# EAGLE board DIGITAL2_4_JLPCB (EAGLE 6.5.0)
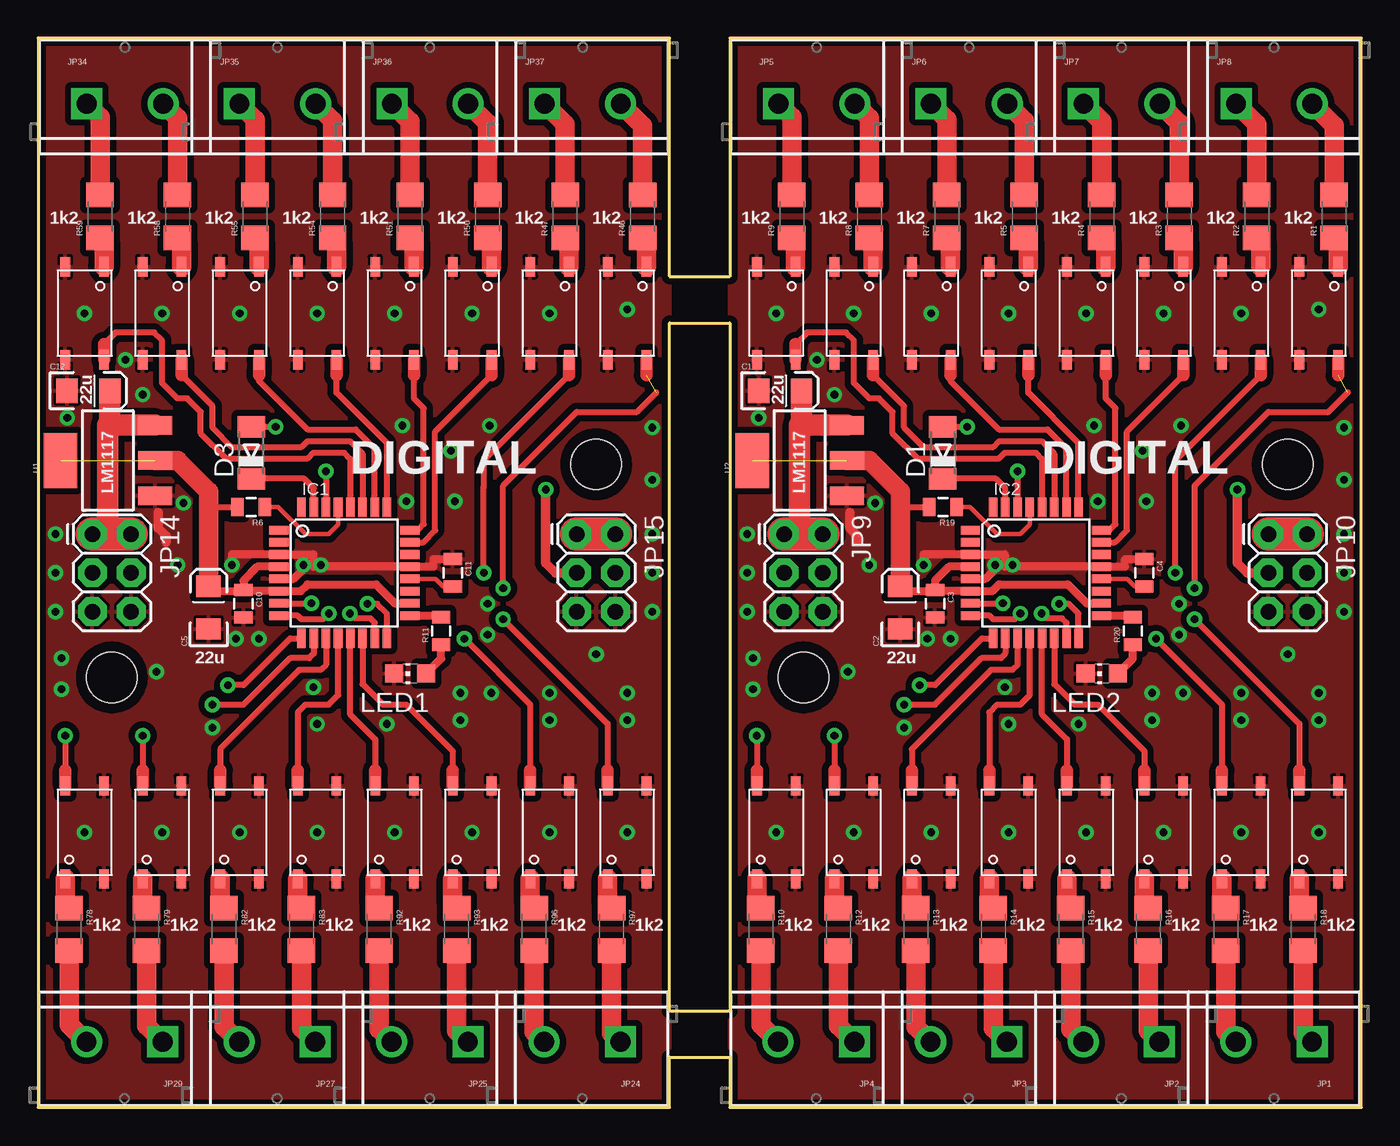
[diagram p0: board, top side]
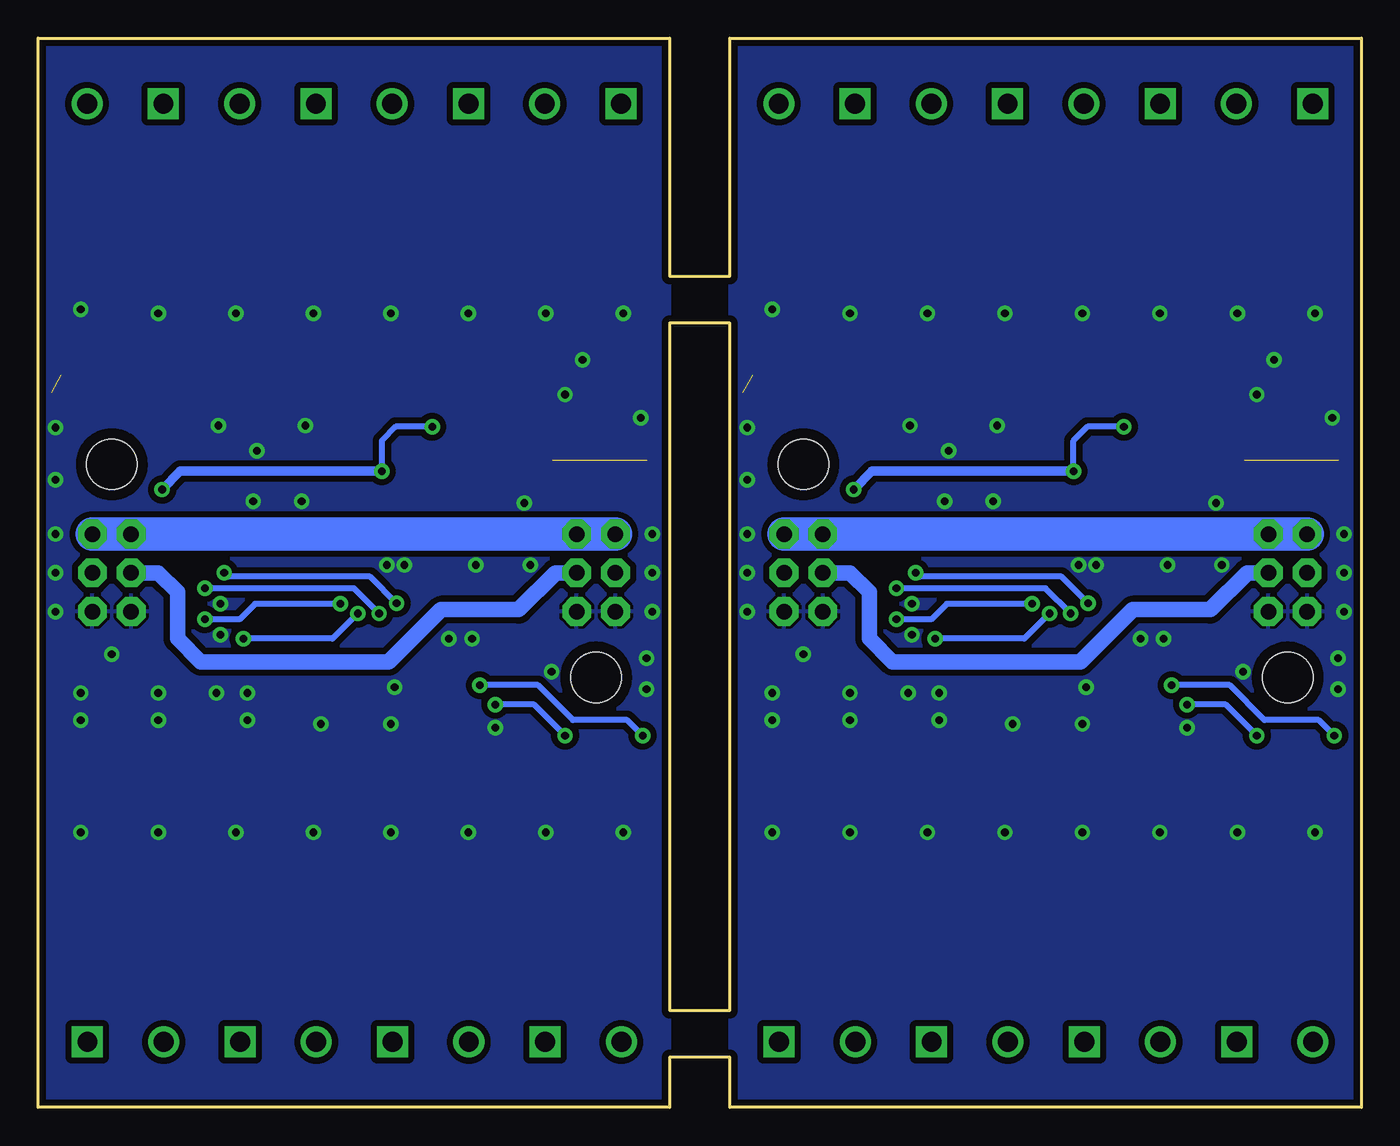
[diagram p1: board, bottom side, seen from below]

Size 86.74 x 70.1 mm. Coordinates in mm from the lower left corner, seen from the top.
Outline: 0,70.1 0,0 41.4,0 41.4,3.3 45.34,3.3 45.34,0 86.74,0 86.74,70.1 45.34,70.1 45.34,54.48 41.4,54.48 41.4,70.1 0,70.1
Outline: 41.4,6.35 41.4,51.44 45.34,51.44 45.34,6.35 41.4,6.35
Copper layers (1*16): Top 0.035mm / dielectric 1.5mm / Bottom 0.035mm
Design rules "default *": minimum track width 8mil, minimum drill 0.4mm, track to track 8mil, track to pad 8mil, pad to pad 8mil, via to via 8mil, smd to smd 8mil, copper to edge 10mil, drill to drill 8mil, minimum pad ring 8mil, minimum via ring 10mil, stop-mask expansion 3mil, vias tented up to drill 0mil, thermal gap 8mil

## Footprints (pad centres in the part's own frame; a part is rotated, then mirrored left to right if it is on the bottom)
EIA3216 = smd 1.4 x 1.6: A 1.4,0; C -1.4,0
0805 = smd 0.8 x 1.2: 1 -0.9,0; 2 0.9,0
MINIMELF = smd 1.4 x 1.8: A 1.7,0; C -1.7,0
TQFP32-08 = smd 1.27 x 0.559: 1 -4.293,2.8; 2 -4.293,2; 3 -4.293,1.2; 4 -4.293,0.4; 5 -4.293,-0.4; 6 -4.293,-1.2; 7 -4.293,-2; 8 -4.293,-2.8; 17 4.293,-2.8; 18 4.293,-2; 19 4.293,-1.2; 20 4.293,-0.4; 21 4.293,0.4; 22 4.293,1.2; 23 4.293,2; 24 4.293,2.8 | smd 0.559 x 1.27: 9 -2.8,-4.293; 10 -2,-4.293; 11 -1.2,-4.293; 12 -0.4,-4.293; 13 0.4,-4.293; 14 1.2,-4.293; 15 2,-4.293; 16 2.8,-4.293; 25 2.8,4.293; 26 2,4.293; 27 1.2,4.293; 28 0.4,4.293; 29 -0.4,4.293; 30 -1.2,4.293; 31 -2,4.293; 32 -2.8,4.293
SCREWTERMINAL-5MM-2 = drill 1.3 pad 2.032 square: 1 0,0 | drill 1.3 pad 2.032: 2 5,0
2X3 = drill 1.016 pad 1.88 octagon: 1 0,0; 2 0,2.54; 3 2.54,0; 4 2.54,2.54; 5 5.08,0; 6 5.08,2.54
CHIP-LED0805 = smd 1.2 x 1.2: A 0,-1.05; C 0,1.05
1206 = smd 1.6 x 1.8: 1 -1.4,0; 2 1.4,0
STAND-OFF = hole 3.302: 0,0
SOT223 = smd 1.219 x 2.235: 1 -2.311,-3.099; 2 0,-3.099; 3 2.311,-3.099 | smd 3.6 x 2.2: 4 0,3.099
TLP181-I = smd 1.27 x 0.635: P$1 -3.048,1.27; P$2 -3.048,-1.27; P$3 3.048,-1.27; P$4 3.048,1.27

## Placement (x,y rotation side)
C1  22uF/16V  [EIA3216]  48.64,46.99 0 top
C2  22uF/16V  [EIA3216]  56.52,32.77 90 top
C3  100n  [0805]  58.8,33.02 270 top
C4  100n  [0805]  72.52,35.05 270 top
C5  22uF/16V  [EIA3216]  11.18,32.77 90 top
C10  100n  [0805]  13.46,33.02 270 top
C11  100n  [0805]  27.18,35.05 270 top
C12  22uF/16V  [EIA3216]  3.3,46.99 0 top
D1  1N4148  [MINIMELF]  59.31,42.93 90 top
D3  1N4148  [MINIMELF]  13.97,42.93 90 top
IC1  MEGA8-AI  [TQFP32-08]  20.07,35.05 0 top
IC2  MEGA8-AI  [TQFP32-08]  65.41,35.05 0 top
JP1  [SCREWTERMINAL-5MM-2]  83.51,4.3 180 top
JP2  [SCREWTERMINAL-5MM-2]  73.51,4.3 180 top
JP3  [SCREWTERMINAL-5MM-2]  63.51,4.3 180 top
JP4  [SCREWTERMINAL-5MM-2]  53.51,4.3 180 top
JP5  [SCREWTERMINAL-5MM-2]  48.53,65.81 0 top
JP6  [SCREWTERMINAL-5MM-2]  58.53,65.81 0 top
JP7  [SCREWTERMINAL-5MM-2]  68.53,65.81 0 top
JP8  [SCREWTERMINAL-5MM-2]  78.53,65.81 0 top
JP9  [2X3]  48.9,37.59 270 top
JP10  [2X3]  80.64,37.59 270 top
JP14  [2X3]  3.56,37.59 270 top
JP15  [2X3]  35.31,37.59 270 top
JP24  [SCREWTERMINAL-5MM-2]  38.17,4.3 180 top
JP25  [SCREWTERMINAL-5MM-2]  28.17,4.3 180 top
JP27  [SCREWTERMINAL-5MM-2]  18.17,4.3 180 top
JP29  [SCREWTERMINAL-5MM-2]  8.17,4.3 180 top
JP34  [SCREWTERMINAL-5MM-2]  3.19,65.81 0 top
JP35  [SCREWTERMINAL-5MM-2]  13.19,65.81 0 top
JP36  [SCREWTERMINAL-5MM-2]  23.19,65.81 0 top
JP37  [SCREWTERMINAL-5MM-2]  33.19,65.81 0 top
LED1  [CHIP-LED0805]  24.38,28.45 90 top
LED2  [CHIP-LED0805]  69.72,28.45 90 top
R1  1.2K  [1206]  84.96,58.42 90 top
R2  1.2K  [1206]  79.88,58.42 90 top
R3  1.2K  [1206]  74.8,58.42 90 top
R4  1.2K  [1206]  69.72,58.42 90 top
R5  1.2K  [1206]  64.64,58.42 90 top
R6  10K  [0805]  13.97,39.37 180 top
R7  1.2K  [1206]  59.56,58.42 90 top
R8  1.2K  [1206]  54.48,58.42 90 top
R9  1.2K  [1206]  49.4,58.42 90 top
R10  1.2K  [1206]  47.37,11.68 270 top
R11  [0805]  26.42,31.24 90 top
R12  1.2K  [1206]  52.45,11.68 270 top
R13  1.2K  [1206]  57.53,11.68 270 top
R14  1.2K  [1206]  62.61,11.68 270 top
R15  1.2K  [1206]  67.69,11.68 270 top
R16  1.2K  [1206]  72.77,11.68 270 top
R17  1.2K  [1206]  77.85,11.68 270 top
R18  1.2K  [1206]  82.93,11.68 270 top
R19  10K  [0805]  59.31,39.37 180 top
R20  [0805]  71.75,31.24 90 top
R46  1.2K  [1206]  39.62,58.42 90 top
R47  1.2K  [1206]  34.54,58.42 90 top
R50  1.2K  [1206]  29.46,58.42 90 top
R51  1.2K  [1206]  24.38,58.42 90 top
R54  1.2K  [1206]  19.3,58.42 90 top
R55  1.2K  [1206]  14.22,58.42 90 top
R58  1.2K  [1206]  9.14,58.42 90 top
R59  1.2K  [1206]  4.06,58.42 90 top
R78  1.2K  [1206]  2.03,11.68 270 top
R79  1.2K  [1206]  7.11,11.68 270 top
R82  1.2K  [1206]  12.19,11.68 270 top
R83  1.2K  [1206]  17.27,11.68 270 top
R92  1.2K  [1206]  22.35,11.68 270 top
R93  1.2K  [1206]  27.43,11.68 270 top
R96  1.2K  [1206]  32.51,11.68 270 top
R97  1.2K  [1206]  37.59,11.68 270 top
STANDOFF1  STAND-OFF  [STAND-OFF]  4.83,28.19 180 top
STANDOFF2  STAND-OFF  [STAND-OFF]  50.16,28.19 180 top
STANDOFF3  STAND-OFF  [STAND-OFF]  36.58,42.16 180 top
STANDOFF4  STAND-OFF  [STAND-OFF]  81.92,42.16 180 top
U1  [SOT223]  4.57,42.42 90 top
U2  [SOT223]  49.91,42.42 90 top
U$1  IS181D-I  [TLP181-I]  83.95,52.07 270 top
U$2  IS181D-I  [TLP181-I]  78.87,52.07 270 top
U$3  IS181D-I  [TLP181-I]  73.79,52.07 270 top
U$4  IS181D-I  [TLP181-I]  68.71,52.07 270 top
U$5  IS181D-I  [TLP181-I]  63.63,52.07 270 top
U$6  IS181D-I  [TLP181-I]  58.55,52.07 270 top
U$7  IS181D-I  [TLP181-I]  53.47,52.07 270 top
U$8  IS181D-I  [TLP181-I]  48.39,52.07 270 top
U$9  IS181D-I  [TLP181-I]  48.39,18.03 90 top
U$10  IS181D-I  [TLP181-I]  53.47,18.03 90 top
U$11  IS181D-I  [TLP181-I]  58.55,18.03 90 top
U$12  IS181D-I  [TLP181-I]  63.63,18.03 90 top
U$13  IS181D-I  [TLP181-I]  38.61,52.07 270 top
U$14  IS181D-I  [TLP181-I]  33.53,52.07 270 top
U$15  IS181D-I  [TLP181-I]  28.45,52.07 270 top
U$16  IS181D-I  [TLP181-I]  23.37,52.07 270 top
U$17  IS181D-I  [TLP181-I]  18.29,52.07 270 top
U$18  IS181D-I  [TLP181-I]  13.21,52.07 270 top
U$19  IS181D-I  [TLP181-I]  8.13,52.07 270 top
U$20  IS181D-I  [TLP181-I]  3.05,52.07 270 top
U$21  IS181D-I  [TLP181-I]  68.71,18.03 90 top
U$22  IS181D-I  [TLP181-I]  73.79,18.03 90 top
U$23  IS181D-I  [TLP181-I]  78.87,18.03 90 top
U$24  IS181D-I  [TLP181-I]  83.95,18.03 90 top
U$29  IS181D-I  [TLP181-I]  3.05,18.03 90 top
U$30  IS181D-I  [TLP181-I]  8.13,18.03 90 top
U$31  IS181D-I  [TLP181-I]  13.21,18.03 90 top
U$32  IS181D-I  [TLP181-I]  18.29,18.03 90 top
U$33  IS181D-I  [TLP181-I]  23.37,18.03 90 top
U$34  IS181D-I  [TLP181-I]  28.45,18.03 90 top
U$35  IS181D-I  [TLP181-I]  33.53,18.03 90 top
U$36  IS181D-I  [TLP181-I]  38.61,18.03 90 top

## Library data of the parts
C1-C5 C10-C12 R1-R20 R46 R47 R50 R51 R54 R55 R58 R59 R78 R79 R82 R83 R92 R93 R96 R97 = SparkFun-Passives
D1 D3 = diode
IC1 IC2 = atmel; MPN: ATMEGA8-16AU; OC_FARNELL: 9171371; OC_NEWARK: 73M8863
JP1-JP8 JP24 JP25 JP27 JP29 JP34-JP37 = SparkFun-Connectors
JP9 JP10 JP14 JP15 = SparkFun-Connectors; PROD_ID: CONN-09701
LED1 LED2 = led
STANDOFF1-STANDOFF4 = SparkFun-Electromechanical
U1 U2 = SparkFun-PowerIC; PROD_ID: VREG-08170
U$1-U$24 U$29-U$36 = IS181-I

## Nets
5V: C12.A JP14.1 JP14.2 JP15.1 JP15.2 U1.3
5V1: C1.A JP9.1 JP9.2 JP10.1 JP10.2 U2.3
COM1: D3.A IC1.30 JP14.4 JP15.3
COM3: D1.A IC2.30 JP9.4 JP10.3
D1: IC2.9 U$9.P$4
D2: IC2.10 U$10.P$4
D3: IC1.8 U$13.P$4
D4: IC1.7 U$14.P$4
D5: IC1.23 U$15.P$4
D6: IC1.24 U$16.P$4
D7: IC1.25 U$17.P$4
D8: IC1.26 U$18.P$4
D9: IC1.27 U$19.P$4
D10: IC1.28 U$20.P$4
D11: IC1.9 U$29.P$4
D12: IC1.10 U$30.P$4
D13: IC1.11 U$31.P$4
D14: IC1.12 U$32.P$4
D15: IC1.13 U$33.P$4
D16: IC1.14 U$34.P$4
D17: IC1.15 U$35.P$4
D18: IC1.16 U$36.P$4
D19: IC2.11 U$11.P$4
D20: IC2.12 U$12.P$4
D21: IC2.13 U$21.P$4
D22: IC2.14 U$22.P$4
D23: IC2.15 U$23.P$4
D24: IC2.16 U$24.P$4
D25: IC2.8 U$1.P$4
D26: IC2.7 U$2.P$4
D27: IC2.23 U$3.P$4
D28: IC2.24 U$4.P$4
D29: IC2.25 U$5.P$4
D30: IC2.26 U$6.P$4
D31: IC2.27 U$7.P$4
D32: IC2.28 U$8.P$4
GND: C5.C C10.2 C11.1 C12.C IC1.3 IC1.5 IC1.21 JP14.5 JP14.6 JP15.5 JP15.6 LED1.C U1.1 U$13.P$2 U$13.P$3 U$14.P$2 U$14.P$3 U$15.P$2 U$15.P$3 U$16.P$2 U$16.P$3 U$17.P$2 U$17.P$3 U$18.P$2 U$18.P$3 U$19.P$2 U$19.P$3 U$20.P$2 U$20.P$3 U$29.P$2 U$29.P$3 U$30.P$2 U$30.P$3 U$31.P$2 U$31.P$3 U$32.P$2 U$32.P$3 U$33.P$2 U$33.P$3 U$34.P$2 U$34.P$3 U$35.P$2 U$35.P$3 U$36.P$2 U$36.P$3
GND2: C1.C C2.C C3.2 C4.1 IC2.3 IC2.5 IC2.21 JP9.5 JP9.6 JP10.5 JP10.6 LED2.C U2.1 U$1.P$2 U$1.P$3 U$2.P$2 U$2.P$3 U$3.P$2 U$3.P$3 U$4.P$2 U$4.P$3 U$5.P$2 U$5.P$3 U$6.P$2 U$6.P$3 U$7.P$2 U$7.P$3 U$8.P$2 U$8.P$3 U$9.P$2 U$9.P$3 U$10.P$2 U$10.P$3 U$11.P$2 U$11.P$3 U$12.P$2 U$12.P$3 U$21.P$2 U$21.P$3 U$22.P$2 U$22.P$3 U$23.P$2 U$23.P$3 U$24.P$2 U$24.P$3
N$1: LED1.A R11.1
N$2: JP8.2 R1.2
N$3: D3.C IC1.31
N$4: JP29.2 R78.2
N$5: C11.2 IC1.20
N$6: JP27.2 R82.2
N$7: JP25.2 R92.2
N$8: JP8.1 R2.2
N$9: R1.1 U$1.P$1
N$10: R2.1 U$2.P$1
N$11: JP24.2 R96.2
N$12: JP7.2 R3.2
N$13: JP7.1 R4.2
N$14: R3.1 U$3.P$1
N$15: R4.1 U$4.P$1
N$16: JP6.2 R5.2
N$17: JP6.1 R7.2
N$18: R5.1 U$5.P$1
N$19: R7.1 U$6.P$1
N$20: JP27.1 R83.2
N$21: JP5.2 R8.2
N$22: JP5.1 R9.2
N$23: JP25.1 R93.2
N$24: R8.1 U$7.P$1
N$25: R9.1 U$8.P$1
N$26: JP4.1 R12.2
N$27: R10.1 U$9.P$1
N$28: JP24.1 R97.2
N$29: R12.1 U$10.P$1
N$30: R13.1 U$11.P$1
N$31: R14.1 U$12.P$1
N$32: R15.1 U$21.P$1
N$33: R16.1 U$22.P$1
N$34: R17.1 U$23.P$1
N$35: R18.1 U$24.P$1
N$36: JP3.1 R14.2
N$37: JP2.1 R16.2
N$38: JP1.1 R18.2
N$39: JP4.2 R10.2
N$40: JP3.2 R13.2
N$41: JP2.2 R15.2
N$42: JP1.2 R17.2
N$45: C4.2 IC2.20
N$46: LED2.A R20.1
N$47: D1.C IC2.31
N$81: JP37.2 R46.2
N$82: JP37.1 R47.2
N$83: R46.1 U$13.P$1
N$84: R47.1 U$14.P$1
N$87: JP36.2 R50.2
N$88: JP36.1 R51.2
N$89: R50.1 U$15.P$1
N$90: R51.1 U$16.P$1
N$93: JP35.2 R54.2
N$94: JP35.1 R55.2
N$95: R54.1 U$17.P$1
N$96: R55.1 U$18.P$1
N$100: JP34.2 R58.2
N$101: JP34.1 R59.2
N$102: R58.1 U$19.P$1
N$103: R59.1 U$20.P$1
N$138: JP29.1 R79.2
N$139: R78.1 U$29.P$1
N$140: R79.1 U$30.P$1
N$146: R82.1 U$31.P$1
N$147: R83.1 U$32.P$1
N$154: R92.1 U$33.P$1
N$155: R93.1 U$34.P$1
N$160: R96.1 U$35.P$1
N$161: R97.1 U$36.P$1
RESET: IC1.29 R6.1
RESET2: IC2.29 R19.1
SCK: IC1.17 R11.2
SCK2: IC2.17 R20.2
VCC: C5.A C10.1 IC1.4 IC1.6 IC1.18 R6.2 U1.2 U1.4
VCC2: C2.A C3.1 IC2.4 IC2.6 IC2.18 R19.2 U2.2 U2.4

## Tracks (layer width: path | path; a pad name or v marks a point on that pad's centre or on a via)
5V
  Top 1.422: 4.57,37.59 4.57,44.73 4.7,44.73 | U1.3 4.7,44.73 | 4.7,44.73 C12.A
  Top 2.184: JP14.2 4.57,37.59 JP14.1 | JP15.1 JP15.2
  Bottom 2.184: JP14.2 JP14.1 JP15.1 JP15.2
5V1
  Top 1.422: 49.91,37.59 49.91,44.73 50.04,44.73 | U2.3 50.04,44.73 | 50.04,44.73 C1.A
  Top 2.184: JP9.2 49.91,37.59 JP9.1 | JP10.1 JP10.2
  Bottom 2.184: JP9.2 JP9.1 JP10.1 JP10.2
COM1  (via drill 0.5)
  Top 0.406: v18.87,41.71 IC1.30 | D3.A v15.57,44.63
  Top 0.61: v33.27,40.51 33.27,35.69 33.91,35.05 JP15.3
  Bottom 0.406: v15.57,44.63 17.96,44.63 18.87,43.72 v18.87,41.71
  Bottom 0.61: v33.27,40.51 32.07,41.71 v18.87,41.71
  Bottom 1.016: JP15.3 33.53,35.05 32.26,33.78 32.26,30.73 30.73,29.21 18.41,29.21 14.99,32.64 9.91,32.64 7.49,35.05 JP14.4
COM3  (via drill 0.5)
  Top 0.406: v64.2,41.71 IC2.30 | D1.A v60.91,44.63
  Top 0.61: v78.61,40.51 78.61,35.69 79.25,35.05 JP10.3
  Bottom 0.406: v60.91,44.63 63.3,44.63 64.2,43.72 v64.2,41.71
  Bottom 0.61: v78.61,40.51 77.41,41.71 v64.2,41.71
  Bottom 1.016: JP10.3 78.87,35.05 77.6,33.78 77.6,30.73 76.07,29.21 63.75,29.21 60.33,32.64 55.24,32.64 52.83,35.05 JP9.4
D1  (via drill 0.5)
  Top 0.406: IC2.9 61.87,30.76 58.8,27.69 v57.78,27.69 | v47.12,24.38 47.12,22.1
  Top 0.813: U$9.P$4 47.12,22.1
  Bottom 0.406: v47.12,24.38 48.13,25.4 51.69,25.4 53.98,27.69 v57.78,27.69
D2  (via drill 0.5)
  Top 0.406: IC2.10 63.41,29.75 63.12,29.46 61.85,29.46 58.8,26.42 v56.77,26.42 | v52.2,24.38 52.2,22.1
  Top 0.813: U$10.P$4 52.2,22.1
  Bottom 0.406: v52.2,24.38 54.23,26.42 v56.77,26.42
D3  (via drill 0.5)  (1 unrouted)
  Top 0.406: IC1.8 17.02,32.25 17.27,32 18.67,32 v19.05,32.38 | v30.48,34.04 30.48,40.77 35.31,45.59 39.24,45.59 40.52,46.87
  Top 0.813: U$13.P$4 39.88,48.01
  Bottom 0.406: v30.48,34.04 20.7,34.04 v19.05,32.38
D4  (via drill 0.5)
  Top 0.406: IC1.7 v17.91,33.05 | v29.21,35.05 29.21,40.64 29.21,40.76 29.21,42.42 34.8,48.01
  Top 0.813: U$14.P$4 34.8,48.01
  Bottom 0.406: v29.21,35.05 28.96,34.8 19.65,34.8 v17.91,33.05
D5
  Top 0.406: IC1.23 25.24,37.05 26.04,37.85 26.04,44.32 29.72,48.01
  Top 0.813: U$15.P$4 29.72,48.01
D6
  Top 0.406: IC1.24 24.9,37.85 25.28,38.24 25.28,45.84 24.64,46.48 24.64,48.01
  Top 0.813: U$16.P$4 24.64,48.01
D7
  Top 0.406: IC1.25 22.87,43.55 19.56,46.86 19.56,48.01
  Top 0.813: U$17.P$4 19.56,48.01
D8
  Top 0.406: IC1.26 22.07,43.21 20.83,44.45 17.65,44.45 14.48,47.62 14.48,48.26
  Top 0.813: U$18.P$4 14.48,48.26 14.48,48.01
D9
  Top 0.406: IC1.27 21.27,42.87 20.45,43.69 17.65,43.69 17.27,43.31 12.7,43.31 11.43,44.58 11.43,45.97 9.4,48.01
  Top 0.813: U$19.P$4 9.4,48.01
D10
  Top 0.406: IC1.28 20.47,42.53 20.07,42.93 18.03,42.93 17.65,42.55 12.32,42.55 10.67,44.2 10.67,45.59 9.78,46.48 9.14,46.48 8.13,47.5 8.13,50.29 7.62,50.8 5.08,50.8 4.32,50.04
  Top 0.813: U$20.P$4 4.32,50.04
D11  (via drill 0.5)
  Top 0.406: IC1.9 16.54,30.76 13.46,27.69 v12.45,27.69 | v1.78,24.38 1.78,22.1
  Top 0.813: U$29.P$4 1.78,22.1
  Bottom 0.406: v1.78,24.38 2.79,25.4 6.35,25.4 8.64,27.69 v12.45,27.69
D12  (via drill 0.5)
  Top 0.406: IC1.10 18.07,29.75 17.78,29.46 16.51,29.46 13.46,26.42 v11.43,26.42 | v6.86,24.38 6.86,22.1
  Top 0.813: U$30.P$4 6.86,22.1
  Bottom 0.406: v6.86,24.38 8.89,26.42 v11.43,26.42
D13
  Top 0.406: IC1.11 18.87,29.03 18.54,28.7 17.13,28.7 11.94,23.51 11.94,22.1
  Top 0.813: U$31.P$4 11.94,22.1
D14
  Top 0.406: IC1.12 19.67,27.03 19.05,26.42 17.53,26.42 17.02,25.91 17.02,22.1
  Top 0.813: U$32.P$4 17.02,22.1
D15
  Top 0.406: IC1.13 20.47,25.76 22.1,24.13 22.1,21.84
  Top 0.813: U$33.P$4 22.1,21.84 22.1,22.1
D16
  Top 0.406: IC1.14 21.27,27.76 22.61,26.42 24.13,26.42 27.18,23.37 27.18,22.1
  Top 0.813: U$34.P$4 27.18,22.1
D17  (via drill 0.5)
  Top 0.406: IC1.15 22.07,31.78 21.78,32.07 20.77,32.07 v20.45,32.38 | v27.94,30.73 32.26,26.42 32.26,22.1
  Top 0.813: U$35.P$4 32.26,22.1
  Bottom 0.406: v27.94,30.73 22.1,30.73 v20.45,32.38
D18  (via drill 0.5)
  Top 0.406: IC1.16 22.87,32.38 22.23,33.02 v21.59,33.02 | v30.48,32 37.34,25.15 37.34,21.84
  Top 0.813: U$36.P$4 37.34,21.84 37.34,22.1
  Bottom 0.406: v21.59,33.02 27.18,33.02 28.19,32 v30.48,32
D19
  Top 0.406: IC2.11 64.2,29.03 63.88,28.7 62.47,28.7 57.28,23.51 57.28,22.1
  Top 0.813: U$11.P$4 57.28,22.1
D20
  Top 0.406: IC2.12 65,27.03 64.39,26.42 62.87,26.42 62.36,25.91 62.36,22.1
  Top 0.813: U$12.P$4 62.36,22.1
D21
  Top 0.406: IC2.13 65.81,25.76 67.44,24.13 67.44,21.84
  Top 0.813: U$21.P$4 67.44,21.84 67.44,22.1
D22
  Top 0.406: IC2.14 66.61,27.76 67.94,26.42 69.47,26.42 72.52,23.37 72.52,22.1
  Top 0.813: U$22.P$4 72.52,22.1
D23  (via drill 0.5)
  Top 0.406: IC2.15 67.41,31.78 67.12,32.07 66.1,32.07 v65.79,32.38 | v73.28,30.73 77.6,26.42 77.6,22.1
  Top 0.813: U$23.P$4 77.6,22.1
  Bottom 0.406: v73.28,30.73 67.44,30.73 v65.79,32.38
D24  (via drill 0.5)
  Top 0.406: IC2.16 68.2,32.38 67.56,33.02 v66.93,33.02 | v75.82,32 82.68,25.15 82.68,21.84
  Top 0.813: U$24.P$4 82.68,21.84 82.68,22.1
  Bottom 0.406: v66.93,33.02 72.52,33.02 73.53,32 v75.82,32
D25  (via drill 0.5)  (1 unrouted)
  Top 0.406: IC2.8 62.36,32.25 62.61,32 64.01,32 v64.39,32.38 | v75.82,34.04 75.82,40.77 80.64,45.59 84.58,45.59 85.86,46.87
  Top 0.813: U$1.P$4 85.22,48.01
  Bottom 0.406: v75.82,34.04 66.04,34.04 v64.39,32.38
D26  (via drill 0.5)
  Top 0.406: IC2.7 v63.25,33.05 | v74.55,35.05 74.55,42.42 80.14,48.01
  Top 0.813: U$2.P$4 80.14,48.01
  Bottom 0.406: v74.55,35.05 74.3,34.8 64.99,34.8 v63.25,33.05
D27
  Top 0.406: IC2.23 70.58,37.05 71.37,37.85 71.37,44.32 75.06,48.01
  Top 0.813: U$3.P$4 75.06,48.01
D28
  Top 0.406: IC2.24 70.24,37.85 70.62,38.24 70.62,45.84 69.98,46.48 69.98,48.01
  Top 0.813: U$4.P$4 69.98,48.01
D29
  Top 0.406: IC2.25 68.2,43.55 64.9,46.86 64.9,48.01
  Top 0.813: U$5.P$4 64.9,48.01
D30
  Top 0.406: IC2.26 67.41,43.21 66.17,44.45 62.99,44.45 59.82,47.62 59.82,48.26
  Top 0.813: U$6.P$4 59.82,48.26 59.82,48.01
D31
  Top 0.406: IC2.27 66.61,42.87 65.79,43.69 62.99,43.69 62.61,43.31 58.04,43.31 56.77,44.58 56.77,45.97 54.74,48.01
  Top 0.813: U$7.P$4 54.74,48.01
D32
  Top 0.406: IC2.28 65.81,42.53 65.41,42.93 63.37,42.93 62.99,42.55 57.66,42.55 56.01,44.2 56.01,45.59 55.12,46.48 54.48,46.48 53.47,47.5 53.47,50.29 52.96,50.8 50.42,50.8 49.66,50.04
  Top 0.813: U$8.P$4 49.66,50.04
GND  (via drill 0.5)
  Top 0.508: v12.7,35.56 12.7,36.25 IC1.3 18.03,36.25 18.03,35.45 IC1.21 25.91,35.45 25.91,35.95 C11.1 | IC1.5 16.75,34.65 17.4,35.31 v17.4,35.56
  Top 0.61: 8.38,37.08 8.38,37.47 7.87,37.97 7.87,38.99
  other vias: 3.05,18.03 23.37,52.07 3.05,52.07 38.61,52.32 8.13,52.07 33.53,52.07 13.21,52.07 28.45,52.07 18.29,52.07 8.13,18.03 13.21,18.03 18.29,18.03 38.61,18.03 33.53,18.03 28.45,18.03 23.37,18.03 9.53,39.62 5.71,49.02 6.86,46.74 18.54,35.56 36.58,29.72 23.88,44.7 29.59,44.7 40.26,44.58 1.91,45.21 1.14,37.59 1.14,35.05 1.14,32.51 40.26,37.59 40.26,35.05 40.26,32.51 1.52,29.46 11.43,24.89 18.29,25.15 22.86,25.15 27.69,25.4 33.53,25.4 38.61,25.4 40.26,41.15 29.46,33.02 7.75,28.57 1.52,27.43 18.03,27.56 27.69,27.18 33.53,27.18 38.61,27.18 29.46,30.99 27.3,39.75 24.13,39.75 12.95,30.73 14.48,30.73 27.05,43.05 9.14,35.56 29.72,27.18
  pour Top (isolate 0.406): 0,70.1 41.4,70.1 41.4,0 0,0
  pour Bottom (isolate 0.406): 0,70.1 41.4,70.1 41.4,0 0,0
GND2  (via drill 0.5)
  Top 0.508: v58.04,35.56 58.04,36.25 IC2.3 63.37,36.25 63.37,35.45 IC2.21 71.25,35.45 71.25,35.95 C4.1 | IC2.5 62.08,34.65 62.74,35.31 v62.74,35.56
  Top 0.61: 53.72,37.08 53.72,37.47 53.21,37.97 53.21,38.99
  other vias: 48.39,18.03 68.71,52.07 48.39,52.07 83.95,52.32 53.47,52.07 78.87,52.07 58.55,52.07 73.79,52.07 63.63,52.07 53.47,18.03 58.55,18.03 63.63,18.03 83.95,18.03 78.87,18.03 73.79,18.03 68.71,18.03 54.86,39.62 51.05,49.02 52.2,46.74 63.88,35.56 81.92,29.72 69.22,44.7 74.93,44.7 85.6,44.58 47.24,45.21 46.48,37.59 46.48,35.05 46.48,32.51 85.6,37.59 85.6,35.05 85.6,32.51 46.86,29.46 56.77,24.89 63.63,25.15 68.2,25.15 73.03,25.4 78.87,25.4 83.95,25.4 85.6,41.15 74.8,33.02 53.09,28.57 46.86,27.43 63.37,27.56 73.03,27.18 78.87,27.18 83.95,27.18 74.8,30.99 72.64,39.75 69.47,39.75 58.29,30.73 59.82,30.73 72.39,43.05 54.48,35.56 75.06,27.18
  pour Top (isolate 0.406): 45.34,70.1 86.74,70.1 86.74,0 45.34,0
  pour Bottom (isolate 0.406): 45.34,70.1 86.74,70.1 86.74,0 45.34,0
N$1
  Top 0.508: LED1.A 26.42,29.43 R11.1
N$2
  Top 1.27: JP8.2 84.96,64.37 R1.2
N$3
  Top 0.406: IC1.31 18.07,40.61 17.45,41.23 D3.C
N$4
  Top 1.27: JP29.2 2.03,5.43 R78.2
N$5
  Top 0.305: IC1.20 26.05,34.65 26.55,34.15 C11.2
N$6
  Top 1.27: JP27.2 12.19,5.27 R82.2
N$7
  Top 1.27: JP25.2 22.35,5.11 R92.2
N$8
  Top 1.27: JP8.1 79.88,64.45 R2.2
N$9
  Top 1.27: R1.1 85.22,56.77 U$1.P$1
N$10
  Top 1.27: R2.1 80.14,56.77 U$2.P$1
N$11
  Top 1.27: JP24.2 32.51,4.95 R96.2
N$12
  Top 1.27: JP7.2 74.8,64.53 R3.2
N$13
  Top 1.27: JP7.1 69.72,64.61 R4.2
N$14
  Top 1.27: R3.1 75.06,56.77 U$3.P$1
N$15
  Top 1.27: R4.1 69.98,56.77 U$4.P$1
N$16
  Top 1.27: JP6.2 64.64,64.69 R5.2
N$17
  Top 1.27: JP6.1 59.56,64.77 R7.2
N$18
  Top 1.27: R5.1 64.9,56.77 U$5.P$1
N$19
  Top 1.27: R7.1 59.82,56.77 U$6.P$1
N$20
  Top 1.27: JP27.1 17.27,5.19 R83.2
N$21
  Top 1.27: JP5.2 54.48,64.85 R8.2
N$22
  Top 1.27: JP5.1 49.4,64.93 R9.2
N$23
  Top 1.27: JP25.1 27.43,5.03 R93.2
N$24
  Top 1.27: R8.1 54.74,56.77 U$7.P$1
N$25
  Top 1.27: R9.1 49.66,56.77 U$8.P$1
N$26
  Top 1.27: JP4.1 52.45,5.35 R12.2
N$27
  Top 1.27: R10.1 47.12,13.34 U$9.P$1
N$28
  Top 1.27: JP24.1 37.59,4.87 R97.2
N$29
  Top 1.27: R12.1 52.2,13.34 U$10.P$1
N$30
  Top 1.27: R13.1 57.28,13.34 U$11.P$1
N$31
  Top 1.27: R14.1 62.36,13.34 U$12.P$1
N$32
  Top 1.27: R15.1 67.44,13.34 U$21.P$1
N$33
  Top 1.27: R16.1 72.52,13.34 U$22.P$1
N$34
  Top 1.27: R17.1 77.6,13.34 U$23.P$1
N$35
  Top 1.27: R18.1 82.68,13.34 U$24.P$1
N$36
  Top 1.27: JP3.1 62.61,5.19 R14.2
N$37
  Top 1.27: JP2.1 72.77,5.03 R16.2
N$38
  Top 1.27: JP1.1 82.93,4.87 R18.2
N$39
  Top 1.27: JP4.2 47.37,5.43 R10.2
N$40
  Top 1.27: JP3.2 57.53,5.27 R13.2
N$41
  Top 1.27: JP2.2 67.69,5.11 R15.2
N$42
  Top 1.27: JP1.2 77.85,4.95 R17.2
N$45
  Top 0.305: IC2.20 71.39,34.65 71.89,34.15 C4.2
N$46
  Top 0.508: LED2.A 71.75,29.43 R20.1
N$47
  Top 0.406: IC2.31 63.41,40.61 62.79,41.23 D1.C
N$81
  Top 1.27: JP37.2 39.62,64.37 R46.2
N$82
  Top 1.27: JP37.1 34.54,64.45 R47.2
N$83
  Top 1.27: R46.1 39.88,56.77 U$13.P$1
N$84
  Top 1.27: R47.1 34.8,56.77 U$14.P$1
N$87
  Top 1.27: JP36.2 29.46,64.53 R50.2
N$88
  Top 1.27: JP36.1 24.38,64.61 R51.2
N$89
  Top 1.27: R50.1 29.72,56.77 U$15.P$1
N$90
  Top 1.27: R51.1 24.64,56.77 U$16.P$1
N$93
  Top 1.27: JP35.2 19.3,64.69 R54.2
N$94
  Top 1.27: JP35.1 14.22,64.77 R55.2
N$95
  Top 1.27: R54.1 19.56,56.77 U$17.P$1
N$96
  Top 1.27: R55.1 14.48,56.77 U$18.P$1
N$100
  Top 1.27: JP34.2 9.14,64.85 R58.2
N$101
  Top 1.27: JP34.1 4.06,64.93 R59.2
N$102
  Top 1.27: R58.1 9.4,56.77 U$19.P$1
N$103
  Top 1.27: R59.1 4.32,56.77 U$20.P$1
N$138
  Top 1.27: JP29.1 7.11,5.35 R79.2
N$139
  Top 1.27: R78.1 1.78,13.34 U$29.P$1
N$140
  Top 1.27: R79.1 6.86,13.34 U$30.P$1
N$146
  Top 1.27: R82.1 11.94,13.34 U$31.P$1
N$147
  Top 1.27: R83.1 17.02,13.34 U$32.P$1
N$154
  Top 1.27: R92.1 22.1,13.34 U$33.P$1
N$155
  Top 1.27: R93.1 27.18,13.34 U$34.P$1
N$160
  Top 1.27: R96.1 32.26,13.34 U$35.P$1
N$161
  Top 1.27: R97.1 37.34,13.34 U$36.P$1
RESET
  Top 0.305: R6.1 15.75,39.37 17.53,37.59 19.05,37.59 19.67,38.21 IC1.29
RESET2
  Top 0.305: R19.1 61.09,39.37 62.87,37.59 64.39,37.59 65,38.21 IC2.29
SCK
  Top 0.508: IC1.17 26.31,32.25 R11.2
SCK2
  Top 0.508: IC2.17 71.64,32.25 R20.2
VCC  (1 unrouted)
  Top 0.406: 11.18,39.12 11.18,39.37 R6.2
  Top 0.508: C5.A 11.18,33.85 13.46,33.85 | IC1.4 14.37,35.45 13.46,34.54 C10.1 13.46,33.85 | 13.46,33.85 IC1.6 17.21,33.85 17.65,34.29 22.16,34.29 23.4,33.05 IC1.18
  Top 0.61: 11.09,37 11.18,37.08
  Top 1.27: C5.A 11.18,37.08 11.18,39.12 | U1.2 9.14,42.42 11.18,40.39 11.18,39.37
VCC2  (1 unrouted)
  Top 0.406: 56.52,39.12 56.52,39.37 R19.2
  Top 0.508: C2.A 56.52,33.85 58.8,33.85 | IC2.4 59.71,35.45 58.8,34.54 C3.1 58.8,33.85 | 58.8,33.85 IC2.6 62.55,33.85 62.99,34.29 67.5,34.29 68.74,33.05 IC2.18
  Top 0.61: 56.43,37 56.52,37.08
  Top 1.27: C2.A 56.52,37.08 56.52,39.12 | U2.2 54.48,42.42 56.52,40.39 56.52,39.37

## Text on the board
tPlace: 1k2 | 1k2 | 1k2 | 1k2 | 1k2 | 1k2 | 1k2 | 1k2 | 1k2 | 1k2 | 1k2 | 1k2 | 1k2 | 1k2 | 1k2 | 1k2 | 22u | 22u | DIGITAL | DIGITAL | LM1117 | LM1117 | 22u | 22u | 1k2 | 1k2 | 1k2 | 1k2 | 1k2 | 1k2 | 1k2 | 1k2 | 1k2 | 1k2 | 1k2 | 1k2 | 1k2 | 1k2 | 1k2 | 1k2